# Altium PCB SensWear-V1R1-PPG.PcbDoc
Units mm, origin at the board's own origin, x right, y up, seen from the top; angles counter-clockwise.
Board outline 21.8 x 8.5 mm, 4 copper layers (Top Layer, Layer 1, Layer 2, Bottom Layer), stack 0.148 mm thick; 9 components, 10 nets, 48 pads, 24 vias.
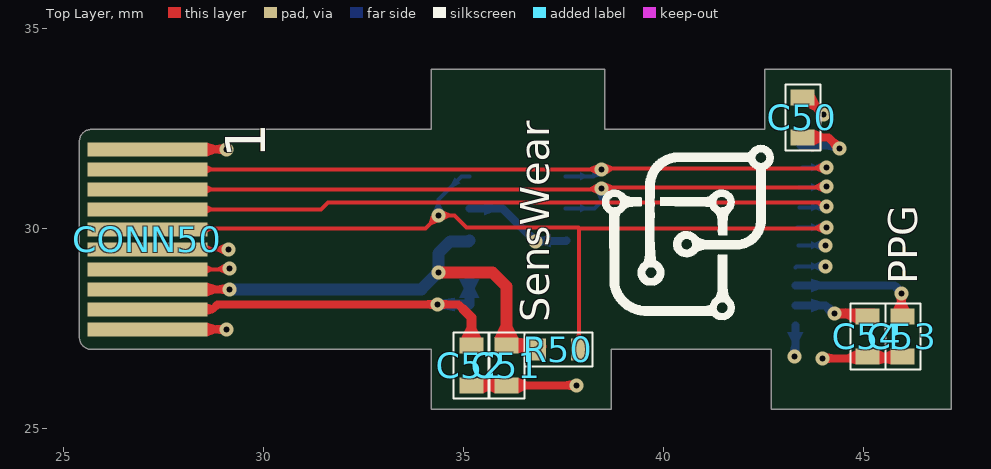
[diagram p0: Top Layer view]
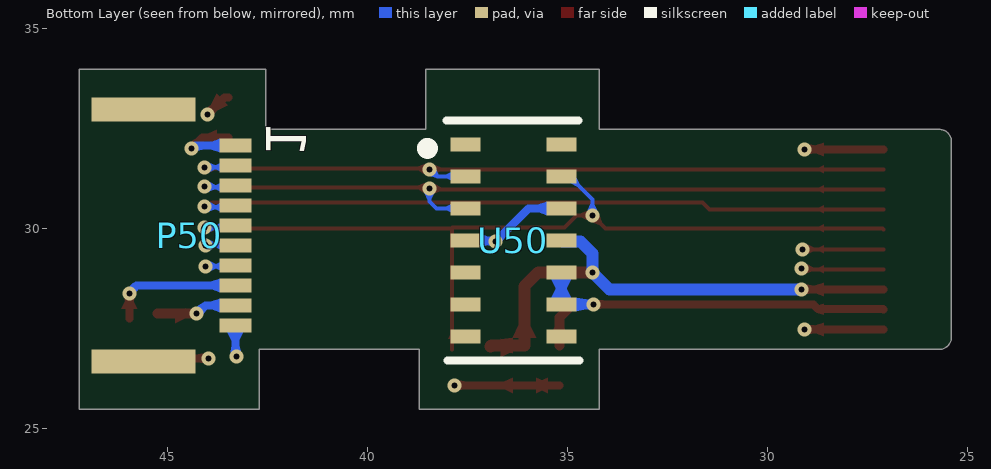
[diagram p1: Bottom Layer view, seen from below]
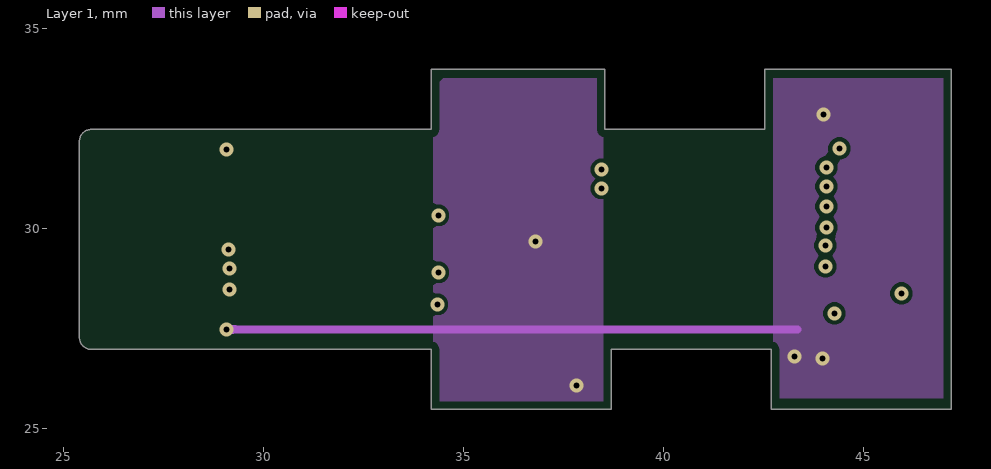
[diagram p2: Layer 1]
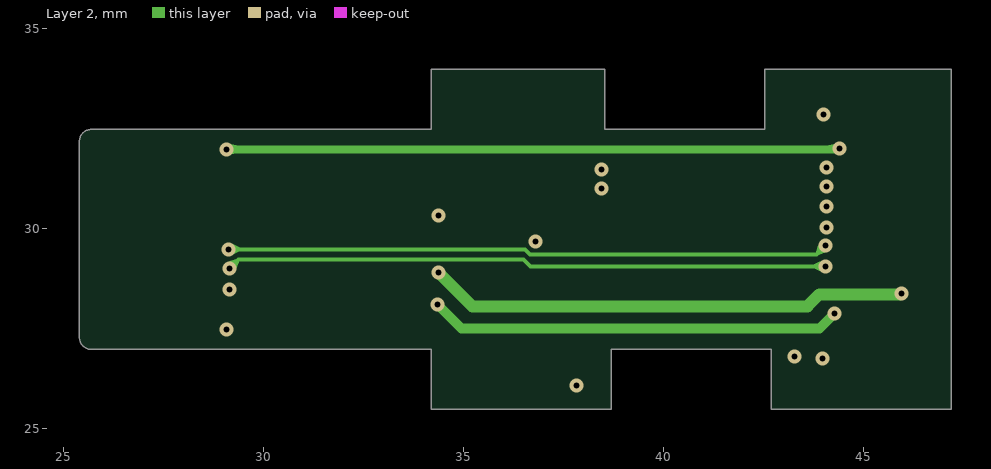
[diagram p3: Layer 2]
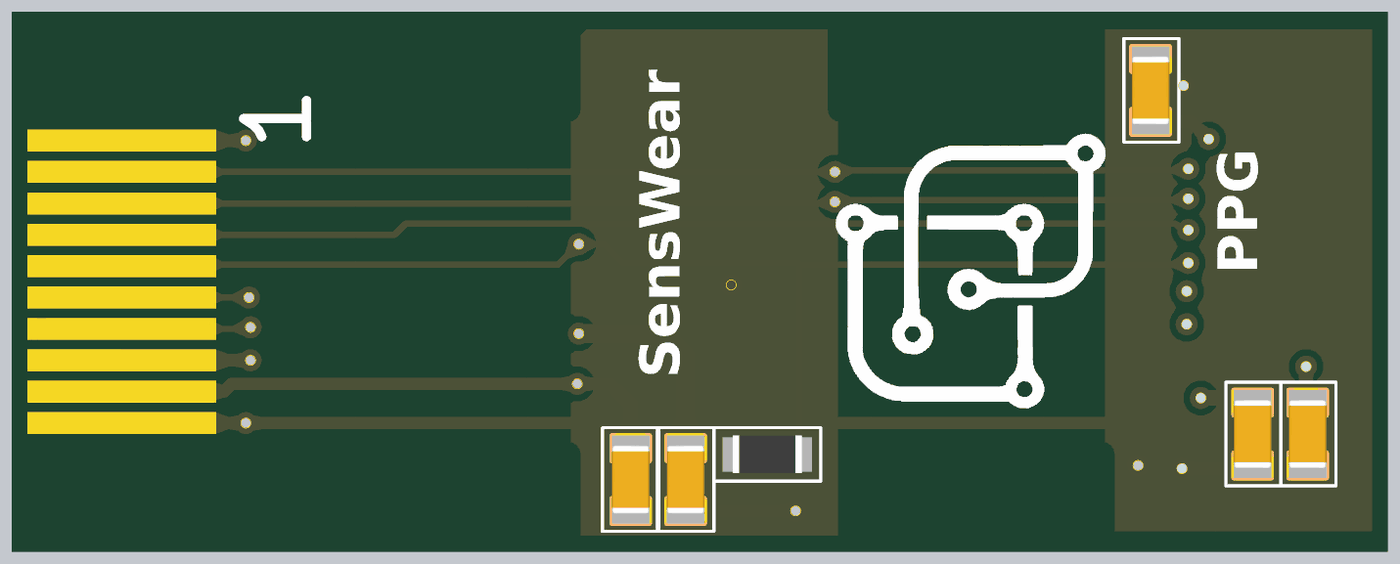
[diagram p4: 3D render of the assembled board from above, using the file's embedded part models]

## Layer stack, top to bottom
Top Solder: solder mask 0.0275, Solder Resist, Dk 2.9
Top Layer: signal copper 0.012
Dielectric 2: prepreg 0.0375, PP-006, Dk 3.3
Layer 1: signal copper 0.012
Dielectric 1: prepreg 0.025, FR-4, Dk 3.3
Layer 2: signal copper 0.012
Dielectric 3: prepreg 0.0375, PP-006, Dk 3.3
Bottom Layer: signal copper 0.012
Bottom Solder: solder mask 0.0275, Solder Resist, Dk 2.9

## Board outline
25.7,26.975 34.2,26.975 34.2,25.475 38.7,25.475 38.7,26.975 42.7,26.975 42.7,25.475 47.2,25.475 47.2,33.975 42.538,33.975 42.538,32.475 38.538,32.475 38.538,33.975 34.2,33.975 34.2,32.475 25.7,32.475 ccw(c25.7,32.175) 25.4,32.175 25.4,27.275 ccw(c25.7,27.275)

## Design rules (kind name [scope] priority, off if disabled: settings)
AcuteAngle [All] p1: minimum=7.50000000000000E+0001 checktracksonly=FALSE
BoardOutlineClearance [All] p1: gap=0.2 ignorepadtopadclearanceinfootprint=FALSE
Clearance Clearance_SolderMaskTrack [IsTrack or IsPad] p1 off: gap=0.1 ignorepadtopadclearanceinfootprint=FALSE
Clearance Clearance_PadTrack [IsTrack vs IsPad] p2: gap=0.22 ignorepadtopadclearanceinfootprint=FALSE
Clearance Clearance_BGA [IsTrack vs IsBGA] p3: gap=0.2 ignorepadtopadclearanceinfootprint=FALSE
Clearance [All] p4: gap=0.1 ignorepadtopadclearanceinfootprint=FALSE
ComponentClearance [All] p1: gap=0.1 collisioncheckmode=3 verticalgap=0.1 showdistances=FALSE
MinimumSolderMaskSliver [All] p1: minsoldermaskwidth=0.12
PolygonConnect [All] p1: thpad.connectstyle=Relief thpad.reliefconductorwidth=0.254 thpad.reliefentries=4 thpad.polygonreliefangle="90 Angle" thpad.airgapwidth=0.254 smdpad.connectstyle=Relief smdpad.reliefconductorwidth=0.254 smdpad.reliefentries=4 smdpad.polygonreliefangle="90 Angle" smdpad.airgapwidth=0.254 via.connectstyle=Direct via.reliefconductorwidth=0.254 via.reliefentries=4 via.polygonreliefangle="90 Angle" via.airgapwidth=0.254
RoutingVias [All] p1: holewidth=0.15 width=0.35 viastyle="Through Hole" minholewidth=0.15 minwidth=0.35 maxholewidth=0.711 maxwidth=1.27
SilkToSilkClearance [All] p1: silktosilkclearance=0.1
SilkToSolderMaskClearance [IsPad] p1: minsilkscreentomaskgap=0.1 clearancetoexposedcopper=TRUE
SolderMaskExpansion [All] p1: expansion=0 istentingtop=FALSE
SupplyNets "Schematic Supply Nets_3" [InNet('V_REG_IO')] p1: voltage=0.000
SupplyNets "Schematic Supply Nets_2" [InNet('GND')] p2: voltage=0.000
SupplyNets "Schematic Supply Nets_1" [InNet('V_SYS')] p3: voltage=0.000
SupplyNets "Schematic Supply Nets" [InNet('1V8')] p4: voltage=0.000
Width Width_50Ohm [IsTrack and HasParameter('Impedance') and HasParameterValue('Impedance', '50')] p1: maxlimit=0.254 minlimit=0.076 preferedwidth=0.254 toplayer_minwidth=0.254 midlayer1_maxwidth=0.076 midlayer1_prefwidth=0.076 midlayer2_maxwidth=0.076 midlayer2_prefwidth=0.076 bottomlayer_minwidth=0.254 minimp=50.000000 maximp=50.000000 favimp=50.000000 checkconnectedcopper=TRUE
Width [All] p2: maxlimit=1 minlimit=0.076 preferedwidth=0.1
26 further rules are at their usual default settings.

## Components (designator, comment, footprint, x,y, rotation, side; value= is the part's Value field where it differs from the comment)
C50 "4.7uF" CAPC1005X05N 43.475,32.775 r90 top
C51 "10uF" CAPC1005X05N 36.075,26.575 r90 top
C52 "10uF" CAPC1005X05N 35.2,26.575 r270 top
C53 "4.7uF" CAPC1005X05N 45.975,27.3 r90 top
C54 "4.7uF" CAPC1005X05N 45.1,27.3 r90 top
CONN50 "NC" 51281-1098-PCB 26.9,27.475 r0 top
P50 "51281-1098" 51281-1098__3 45.6,29.825 r270 bottom
R50 "1.5 k" RESC1005X04N 37.375,26.975 r180 top
U50 "MAX30101EFD+T" 14-LEAD-OESIP 36.35,29.7 r180 bottom

## Footprints (in the part's own frame and the unit in brackets; to place one, negate y for a bottom-side part, rotate by r counter-clockwise, add the part's x,y. Pads: shape width x height; smd on the part's side, far side on the other; paste and mask are expansions set on the pad)
14-LEAD-OESIP [mm]
  rect 0.75x0.35 smd: 1(-1.2,2.4) 2(-1.2,1.6) 3(-1.2,0.8) 4(-1.2,0) 5(-1.2,-0.8) 6(-1.2,-1.6) 7(-1.2,-2.4) 8(1.2,-2.4) 9(1.2,-1.6) 10(1.2,-0.8) 11(1.2,0) 12(1.2,0.8) 13(1.2,1.6) 14(1.2,2.4)
  silkscreen extent -2.21,-3 1.65,3, body extent -1.4,-2.8 1.4,2.8, height 1.33
51281-1098-PCB [mm]
  rect 3x0.35 smd paste-400 mask+0: 1(0.2,0) 2(0.2,0.5) 3(0.2,1) 4(0.2,1.5) 5(0.2,2) 6(0.2,2.5) 7(0.2,3) 8(0.2,3.5) 9(0.2,4) 10(0.2,4.5)
51281-1098__3 [mm]
  rect 0.6x2.6 smd: 0(-3.15,0) 0(3.15,0)
  rect 0.35x0.8 smd: 1(-2.25,2.3) 2(-1.75,2.3) 3(-1.25,2.3) 4(-0.75,2.3) 5(-0.25,2.3) 6(0.25,2.3) 7(0.75,2.3) 8(1.25,2.3) 9(1.75,2.3) 10(2.25,2.3)
  body extent -3.55,-1.48 3.55,2.57, height 1.17
CAPC1005X05N [mm] "Chip Capacitor, 2-Leads, Body 1.00x0.50mm, IPC Medium Density"
  rect 0.4x0.6 smd mask+0.04: 1(-0.5,0) 2(0.5,0)
  silkscreen extent -0.82,-0.45 0.82,0.43, body extent -0.55,-0.3 0.55,0.3, height 0.6
RESC1005X04N [mm] "Chip Resistor, 2-Leads, Body 1.00x0.50mm, IPC Medium Density"
  rect 0.4x0.55 smd: 1(-0.51,0) 2(0.51,0)
  silkscreen extent -0.85,-0.43 0.85,0.43, body extent -0.55,-0.3 0.55,0.3, height 0.6

## Part data
C50 C53 C54: library part GRM155R61A475MEAAD, "Multilayer Ceramic Capacitor, 4.7 uF, 10 V, ± 20%, X5R, 0402 [1005 Metric]", Case Code (Imperial)=0402, Case Code (Metric)=1005, Dielectric=1537DielectricType, Manufacturer=Murata, Max Operating Temperature=85°C, Min Operating Temperature=-55°C, Supplier Part Number 1=81-GRM155R61A475MEAD, Tolerance=20%, Voltage Rating=10V, Case/Package=0402, Category="Ceramic Capacitors", ComponentLink1Description=http://www.farnell.com/datasheets/2189109.pdf?src-supplier=Farnell, ComponentLink1URL=http://www.farnell.com/datasheets/2189109.pdf?src-supplier=Farnell, ComponentLink2Description=http://www.farnell.com/datasheets/2189109.pdf?src-supplier=Newark, ComponentLink2URL=http://www.farnell.com/datasheets/2189109.pdf?src-supplier=Newark, ComponentLink3Description=http://www.farnell.com/datasheets/2189109.pdf?src-supplier=Element14, ComponentLink3URL=http://www.farnell.com/datasheets/2189109.pdf?src-supplier=Element14, ComponentLink4Description=http://datasheet.octopart.com/GRM155R61A475MEAAD-Murata-datasheet-68589269.pdf?src-supplier=Distrelec, ComponentLink4URL=http://datasheet.octopart.com/GRM155R61A475MEAAD-Murata-datasheet-68589269.pdf?src-supplier=Distrelec, ComponentLink5Description=http://datasheet.octopart.com/GRM155R61A475MEAAD-Murata-datasheet-68589269.pdf?src-supplier=Farnell, ComponentLink5URL=http://datasheet.octopart.com/GRM155R61A475MEAAD-Murata-datasheet-68589269.pdf?src-supplier=Farnell, ComponentLink6Description=https://search.murata.co.jp/Ceramy/image/img/A01X/G101/ENG/GRM155R61A475MEAA-01.pdf?src-supplier=Digi-Key, ComponentLink6URL=https://search.murata.co.jp/Ceramy/image/img/A01X/G101/ENG/GRM155R61A475MEAA-01.pdf?src-supplier=Digi-Key, ComponentLink7Description=http://datasheet.octopart.com/GRM155R61A475MEAAD-Murata-datasheet-68589269.pdf?src-supplier=Future+Electronics, ComponentLink7URL=http://datasheet.octopart.com/GRM155R61A475MEAAD-Murata-datasheet-68589269.pdf?src-supplier=Future+Electronics, ComponentLink8Description=https://datasheet.octopart.com/GRM155R61A475MEAAD-Murata-datasheet-68589269.pdf?src-supplier=Newark, ComponentLink8URL=https://datasheet.octopart.com/GRM155R61A475MEAAD-Murata-datasheet-68589269.pdf?src-supplier=Newark, ComponentLink9Description=http://datasheet.octopart.com/GRM155R61A475MEAAD-Murata-datasheet-68589269.pdf?src-supplier=Verical, ComponentLink9URL=http://datasheet.octopart.com/GRM155R61A475MEAAD-Murata-datasheet-68589269.pdf?src-supplier=Verical, ComponentLink10Description=https://datasheet.octopart.com/GRM155R61A475MEAAD-Murata-datasheet-165579666.pdf?src-supplier=TME, ComponentLink10URL=https://datasheet.octopart.com/GRM155R61A475MEAAD-Murata-datasheet-165579666.pdf?src-supplier=TME, ComponentLink11Description=http://datasheet.octopart.com/GRM155R61A475MEAAD-Murata-datasheet-68589269.pdf?src-supplier=Quest, ComponentLink11URL=http://datasheet.octopart.com/GRM155R61A475MEAAD-Murata-datasheet-68589269.pdf?src-supplier=Quest, ComponentLink12Description=http://datasheet.octopart.com/GRM155R61A475MEAAD-Murata-datasheet-68589269.pdf?src-supplier=TTI, ComponentLink12URL=http://datasheet.octopart.com/GRM155R61A475MEAAD-Murata-datasheet-68589269.pdf?src-supplier=TTI, ComponentLink13Description=http://datasheet.octopart.com/GRM155R61A475MEAAD-Murata-datasheet-68589269.pdf?src-supplier=NAC+Semi, ComponentLink13URL=http://datasheet.octopart.com/GRM155R61A475MEAAD-Murata-datasheet-68589269.pdf?src-supplier=NAC+Semi, Height=650um, Length=1mm, Manufacturer Part Number=GRM155R61A475MEAAD, Material=4241ConductorMaterial, Mounting Technology="Surface Mount", Packaging="Tape and Reel", Pricing="10000=0,0187, 50000=0,0159, 100000=0,0132 (USD)", RoHS=Yes, RoHS Compliant=Yes, Series=GRM, Stock=930000, Supplier 1=Mouser, Supplier 2=Farnell, Supplier Part Number 2=3581674, Thickness=500um, Voltage Rating (DC)=10V, Width=500um
C51 C52: library part CL05A106MP5NUNC, "Multilayer Ceramic Capacitor, 10 uF, 10 V, ± 20%, X5R, 0402 [1005 Metric]", Case Code (Imperial)=0402, Case Code (Metric)=1005, Dielectric=X5R, Manufacturer=Samsung, Max Operating Temperature=85°C, Min Operating Temperature=-55°C, Package Quantity=1, Supplier Part Number 1=187-CL05A106MP5NUNC, Tolerance=20%, Voltage Rating=10V, Case/Package=0402, Category="Ceramic Capacitors", ComponentLink1Description=https://datasheet.ciiva.com/25721/cl05a106mp5nunc-25721584.pdf?src-supplier=Digi-Key, ComponentLink1URL=https://datasheet.ciiva.com/25721/cl05a106mp5nunc-25721584.pdf?src-supplier=Digi-Key, ComponentLink2Description=https://datasheet.ciiva.com/26838/getdatasheetpartid-745310-26838170.pdf?src-supplier=Verical, ComponentLink2URL=https://datasheet.ciiva.com/26838/getdatasheetpartid-745310-26838170.pdf?src-supplier=Verical, Depth=0.5mm, Lead Free="Lead Free", Length=1mm, Manufacturer Part Number=CL05A106MP5NUNC, Mounting Technology="Surface Mount", Packaging="Tape and Reel", Pricing="1=0,1584, 10=0,0737, 25=0,073, 100=0,0424, 250=0,042, 500=0,0416, 1000=0,0375 (USD)", Radiation Hardening=No, RoHS=Yes, RoHS Compliant=Yes, Series=CL, Stock=275, Supplier="Arrow Electronics", Supplier 1=Mouser, Supplier 2=Digikey, Supplier Part Number=CL05A106MP5NUNC, Supplier Part Number 2=1276-1450-1-ND, Thickness=0.028inch, Width=0.02inch
CONN50: library part 51281-1098-PCB, System=Connector
P50: "FFC/FPC Connector, Surface Mount, Right-Angle, Non-ZIF, Dual Contact Style", Manufacturer=Molex, Supplier Part Number=900-0512811098CT-ND, Supplier Part Number 1=538-51281-1098, ComponentLink1Description=https://datasheet.octopart.com/51281-1098-Molex-datasheet-165827616.pdf?src-supplier=Farnell, ComponentLink1URL=https://datasheet.octopart.com/51281-1098-Molex-datasheet-165827616.pdf?src-supplier=Farnell, Manufacturer Part Number=51281-1098, Pricing="1=0.7, 10=0.594, 25=0.5568, 50=0.53, 100=0.5047, 250=0.47304, 500=0.45042, 1000=0.42891 (USD)", RoHS=No, Stock=2876, Supplier=Digikey, Supplier 1=Mouser, Supplier 2=Digikey, Supplier 3=Digikey, Supplier Part Number 2=900-0512811098CT-ND, Supplier Part Number 3=900-0512811098DKR-ND, System=Connector
R50: library part ERJ-2RKF1501X, "RES SMD 1.5K OHM 1% 1/10W 0402", Manufacturer="Panasonic Electronic Components", Operating Temperature="-55°C ~ 155°C", Package / Case="0402 (1005 Metric)", Power (Watts)="0.1W, 1/10W", Resistance (Ohms)=1.5k, Supplier Device Package=0402, Supplier Part Number 1=P1.50KLDKR-ND, Temperature Coefficient=±100ppm/°C, Tolerance=±1%, Category=Resistors, ComponentLink1Description=https://industrial.panasonic.com/cdbs/www-data/pdf/RDA0000/AOA0000C283.pdf, ComponentLink1URL=https://industrial.panasonic.com/cdbs/www-data/pdf/RDA0000/AOA0000C283.pdf, Composition="Thick Film", Failure Rate=-, Features="Automotive AEC-Q200", Height - Seated (Max)="0.016\" (0.40mm)", Manufacturer Part Number=ERJ-2RKF1501X, Number of Terminations=2, Packaging=Digi-Reel®, Part Status=Active, Pricing 1="1=0.1, 10=0.025, 25=0.018, 50=0.0136, 100=0.01, 250=0.00764, 500=0.00612, 1000=0.00451, 5000=0.00323 (USD)", RoHS="RoHS Compliant", Size / Dimension="0.039\" L x 0.020\" W (1.00mm x 0.50mm)", Stock 1=1349197, Supplier 1=Digi-Key
U50: "High-Sensitivity Pulse Oximeter and Heart-Rate Sensor for Fitness & Healthcare", Manufacturer=Maxim, Max Operating Temperature=85°C, Min Operating Temperature=-40°C, Supplier Part Number=MAX30101EFD+TCT-ND, Supplier Part Number 1=700-MAX30101EFD+T, Category=Sensors, ComponentLink1Description=https://datasheets.maximintegrated.com/en/ds/MAX30101.pdf?src-supplier=Digikey, ComponentLink1URL=https://datasheets.maximintegrated.com/en/ds/MAX30101.pdf?src-supplier=Digikey, Manufacturer Part Number=MAX30101EFD+T, Output Type=I2C, Packaging="Cut Tape", Pricing="1=11.32, 10=10.228, 25=9.752, 100=8.4676, 250=8.08708, 500=7.3735, 1000=6.42208 (USD)", RoHS=Yes, RoHS Compliant=Yes, Series=-, Stock=1955, Supplier=Digikey, Supplier 1=Mouser, Supplier 2=Digikey, Supplier 3=Digikey, Supplier Part Number 2=MAX30101EFD+TCT-ND, Supplier Part Number 3=MAX30101EFD+TDKR-ND

## Via types
v1: diameter 0.35, hole 0.15, Top Layer to Bottom Layer, tented both sides, 24 vias

## Nets (pads, with @x,y where several pads share a name; then routed paths per layer and width w, separated by ;. In a path a pad name is that pad's centre, name@x,y a point inside that pad or via, vN(x,y) a via of type N, cw(c..) or ccw(c..) an arc to the next point about the centre after c; other vN are vias at no path point)
1V8: C51.2 C53.2 CONN50.3 P50.8 R50.2 U50.11 | length 28.5
  Top Layer w0.2: CONN50.3 v1(29.15,28.475) ; C53.2@45.95,27.75 v1(45.95,28.375)
  Top Layer w0.3: v1(34.375,28.9) 35.725,28.9 36.075,28.55 C51.2 36.9,27.075 R50.2@36.925,27.05
  Layer 2 w0.3: v1(34.375,28.9) 35.225,28.05 43.6,28.05 43.9,28.35 45.911,28.35 45.927,28.365 45.96,28.365 v1@45.966,28.359
  Bottom Layer w0.2: P50.8 45.775,28.575 v1@45.975,28.375
  Bottom Layer w0.3: v1(29.15,28.475) 33.95,28.475 v1(34.375,28.9) 34.375,29.375 34.675,29.675 35.125,29.675 U50.11
GND: C50.2 C51.1 C52.2 C53.1 C54.1 CONN50.1 P50.10 U50.4 U50.12 | length 25.2
  Top Layer w0.2: CONN50.1 v1(29.075,27.475) ; C52.2 C51.1 v1(37.825,26.075) ; C50.2 43.575,33.275 v1@44.013,32.837 ; v1@43.95,26.75 v1(43.975,26.75) 45.925,26.75 C53.1
  Layer 1 w0.2: v1(29.075,27.475) 43.35,27.475
  Bottom Layer w0.2: U50.12 35.975,30.5 v1(36.8,29.675) 36.813,29.688 37.563,29.688 U50.4@37.575,29.7 ; v1@43.3,26.775 P50.10
  other v1: 43.275,26.8 44,32.85
GPIO_0: CONN50.7 P50.4 | length 17.8
  Top Layer w0.1: CONN50.7 31.442,30.475 31.617,30.65 43.875,30.65 44.05,30.475 v1@44.075,30.475
  Bottom Layer w0.1: P50.4@43.4,30.525 43.957,30.525 44.007,30.475 v1@44.075,30.475
  other v1: 44.075,30.55
GPIO_1: CONN50.6 P50.5 R50.1 U50.13 | length 22.4
  Top Layer w0.1: CONN50.6 27.125,30 34.05,30 v1(34.375,30.325) 34.775,30.325 35.075,30.025 37.875,30.025 37.9,30 ; R50.1 37.885,29.985 37.9,30 ; v1(44.075,30.025) 44.05,30 37.9,30
  Bottom Layer w0.1: v1(34.375,30.325) 34.375,30.725 34.95,31.3 U50.13 ; P50.5@43.35,30.025 v1(44.075,30.025)
GPIO_2: CONN50.5 P50.6 | length 17.8
  Top Layer w0.1: CONN50.5 v1(29.125,29.475) v1@29.15,29.5
  Layer 2 w0.1: v1(29.125,29.475) 36.54,29.475 36.665,29.35 43.825,29.35 v1(44.05,29.575)
  Bottom Layer w0.1: P50.6@43.375,29.575 v1(44.05,29.575)
GPIO_3: CONN50.4 P50.7 | length 17.9
  Top Layer w0.1: CONN50.4 29.125,28.975 v1(29.15,29)
  Layer 2 w0.1: v1(29.15,29) 29.375,29.225 36.508,29.225 36.683,29.05 v1(44.05,29.05)
  Bottom Layer w0.1: P50.7@43.3,29.025 43.325,29.05 v1(44.05,29.05)
SCL: CONN50.9 P50.2 U50.2 | length 18.6
  Top Layer w0.1: CONN50.9 v1(38.45,31.475) 38.475,31.5 44.05,31.5 v1(44.075,31.525)
  Bottom Layer w0.1: U50.2 38.25,31.3 38.425,31.475 v1(38.45,31.475) ; P50.2@43.475,31.525 v1(44.075,31.525)
SDA: CONN50.8 P50.3 U50.3 | length 19
  Top Layer w0.1: CONN50.8 38.45,30.975 38.5,31.025 44.05,31.025 v1(44.075,31.05)
  Bottom Layer w0.1: U50.3 38.275,30.5 38.45,30.675 v1(38.45,31) ; P50.3@43.4,31.025 44.05,31.025 v1(44.075,31.05)
V_REG_IO: C52.1 C54.2 CONN50.2 P50.9 U50.9 U50.10 | length 22.9
  Top Layer w0.2: CONN50.2 27.105,27.98 28.733,27.98 28.853,28.1 v1(34.35,28.1) 34.875,28.1 35,27.975
  Top Layer w0.25: 35,27.975 35.2,27.775 C52.1 ; v1(44.275,27.875) C54.2@45.25,27.875
  Layer 2 w0.25: v1(34.35,28.1) 34.95,27.5 43.9,27.5 v1(44.275,27.875)
  Bottom Layer w0.2: P50.9 44.05,28.075 v1@44.262,27.862
  Bottom Layer w0.25: v1(34.35,28.1) U50.9 U50.10
V_SYS: C50.1 CONN50.10 P50.1 | length 19.3
  Top Layer w0.2: CONN50.10 v1(29.075,31.975) ; C50.1 44.125,32.275 v1(44.4,32)
  Layer 2 w0.2: v1(29.075,31.975) 44.375,31.975 v1(44.4,32)
  Bottom Layer w0.2: P50.1@43.43,32.07 44.289,32.07 44.359,32 v1(44.4,32)
pads on no net: P50.0 U50.1 U50.5 U50.6 U50.7 U50.8 U50.14

## Polygon pours and split planes (outlines as drawn)
GND on Layer 1 "GND_L02_P001" (solid, pour order 1): 42.75,33.75 47,33.75 47,25.75 42.75,25.75
GND on Layer 1 "GND_L02_P000" (solid, pour order 0): 34.25,33.75 38.5,33.75 38.5,25.5 34.25,25.5

## Silkscreen, mask and mechanical layers (free items; w line width, h text height)
Top Overlay:
  drawing of 3 lines, arcs and shapes, not listed
  text "PPG" at 46.6,28.6 h1.25 r90
  text "SensWear" at 37.4,27.65 h1.25 r90
Bottom Overlay:
  text "1" at 42.525,31.775 h1 r90
Board:
  lines w0.1: 38.538,32.475 38.538,33.975 34.2,33.975 34.2,32.475 25.7,32.475 ccw(c25.7,32.175) 25.4,32.175 25.4,27.275 ccw(c25.7,27.275) 25.7,26.975 34.2,26.975 34.2,25.475 38.7,25.475 38.7,26.975 42.675,26.975 ; 38.563,32.475 42.538,32.475 42.538,33.975 47.2,33.975 47.2,25.475 ; 42.7,26.975 42.7,25.475 47.175,25.475 ; 47.175,25.475 47.175,25.475
Fab Notes:
  lines w0.1: 38.538,32.475 38.538,33.975 34.2,33.975 34.2,32.475 25.7,32.475 ccw(c25.7,32.175) 25.4,32.175 25.4,27.275 ccw(c25.7,27.275) 25.7,26.975 34.2,26.975 34.2,25.475 38.7,25.475 38.7,26.975 42.675,26.975 ; 38.563,32.475 42.538,32.475 42.538,33.975 47.2,33.975 47.2,25.475 ; 42.7,26.975 42.7,25.475 47.175,25.475 ; 47.175,25.475 47.175,25.475
  text "Stiffner" at 25.1,27.375 h0.7 r90
Top Assembly:
  lines w0.1: 25.4,24.3 25.4,34.3 ; 30.2,24.55 30.2,33.875 ; 35.675,34.125 35.7,24.35

## Dimensions
25.7,26.975 to 30.15,32.475 on Bottom Assembly
38.538,32.475 to 42.538,32.475 on Bottom Assembly
38.7,25.475 to 42.7,26.975 on Bottom Assembly
34.2,25.475 to 38.7,25.475 on Bottom Assembly
47.2,25.475 to 47.175,33.975 on Bottom Assembly
25.4,32.175 to 47.2,33.975 on Bottom Assembly
25.4,24.3 to 30.2,24.55 on Bottom Assembly
34.2,25.475 to 47.2,25.475 on Bottom Assembly
30.2,33.875 to 34.2,32.475 on Bottom Assembly

## Text inside footprints (layer, text, board x,y; h text height)
CONN50: Top Overlay "1" at 30.05,31.75 h1 r90